# EAGLE board epapertagjig-cam (EAGLE 9.6.2)
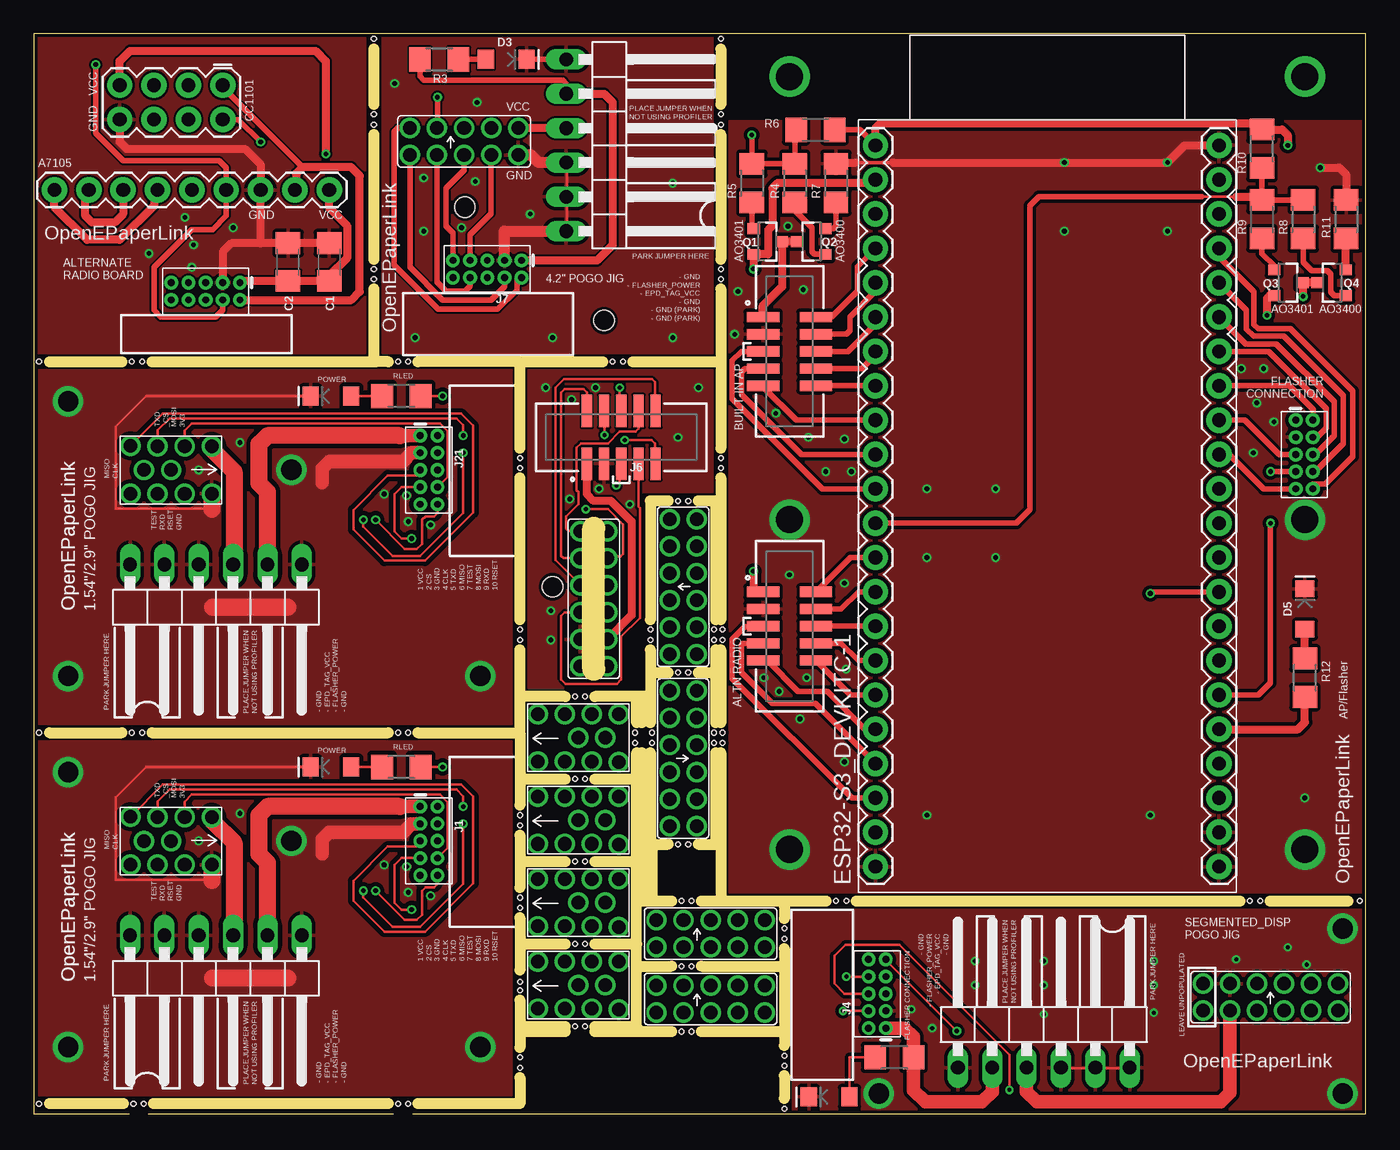
[diagram p0: board, top side]
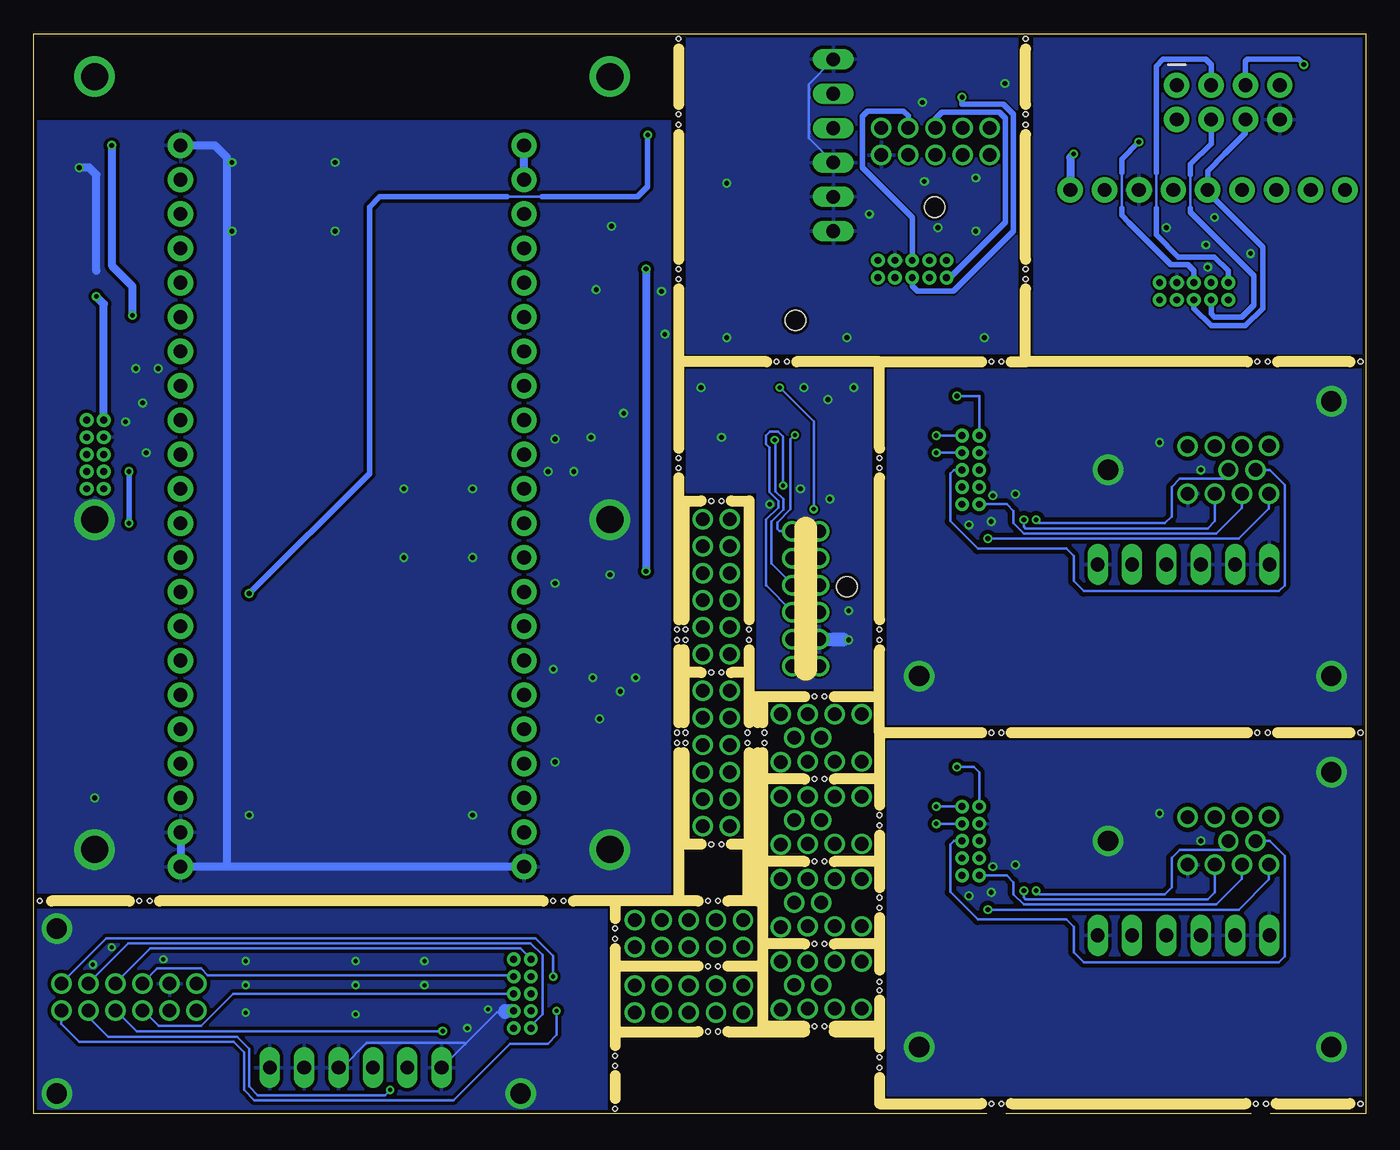
[diagram p1: board, bottom side, seen from below]

Size 98.48 x 79.87 mm. Coordinates in mm from the lower left corner, seen from the top.
Outline: 7.05,0 0,0 0,79.87 98.48,79.87 98.48,0 28,0
Outline: 8.45,0 26.61,0
Copper layers (1*16): Top 0.035mm / dielectric 1.5mm / Bottom 0.035mm
Design rules "dirt_cheap_dirty_boards.v1.1": minimum track width 6mil, minimum drill 12mil, track to track 6mil, track to pad 6mil, pad to pad 6mil, via to via 6mil, smd to smd 0mil, copper to edge 10mil, drill to drill 10mil, minimum pad ring 10mil, minimum via ring 6mil, stop-mask expansion 2mil, vias tented up to drill 25mil, thermal gap 10mil
Net classes: 0 default: width 0.203 mm
Holes 1.5 mm at 38.35,38.99 31.88,67.06 42.16,58.67
Holes 0.35 mm at 7.24,28.19 8,28.19 26.92,28.19 27.69,28.19 26.92,0.76 27.69,0.76 7.37,0.76 8.13,0.76 7.24,55.63 8,55.63 26.92,55.63 27.69,55.63 35.94,3.43 35.94,4.19 25.15,73.91 25.15,73.15 25.15,62.48 25.15,61.72 50.8,61.72 50.8,62.48 50.8,73.91 50.8,73.15 35.94,48.51 35.94,47.75 35.94,35.81 35.94,35.05 45.59,35.05 45.59,35.81 50.93,35.81 50.93,35.05 50.29,35.81 50.29,35.05 50.8,47.75 50.8,48.51 42.8,55.63 43.56,55.63 40.01,6.48 40.77,6.48 40.01,12.57 40.77,12.57 40.01,18.67 40.77,18.67 40.01,24.77 40.77,24.77 40.01,30.86 40.77,30.86 35.94,9.78 35.94,9.14 35.94,16 35.94,15.24 35.94,22.1 35.94,21.34 47.88,10.92 48.64,10.92 47.88,6.1 48.64,6.1 47.88,15.75 48.64,15.75 47.62,19.94 48.39,19.94 47.62,32.64 48.39,32.64 47.62,45.34 48.39,45.34 45.72,28.19 45.72,27.43 44.45,27.43 44.45,28.19 50.29,28.19 50.29,27.43 50.93,28.19 50.93,27.43 55.5,3.56 55.5,4.32 55.5,13.72 55.5,12.95 59.31,15.75 60.07,15.75 89.92,15.75 90.68,15.75 0.38,0.76 0.38,28.19 0.38,55.63 98.04,15.75 55.5,0.38 25.15,79.5 50.8,79.5
Milling: 76 lines

## Footprints (pad centres in the part's own frame; a part is rotated, then mirrored left to right if it is on the bottom)
2X5-SMD-1.27MM = smd 0.76 x 2.4: 1 2.54,1.95; 2 2.54,-1.95; 3 1.27,1.95; 4 1.27,-1.95; 5 0,1.95; 6 0,-1.95; 7 -1.27,1.95; 8 -1.27,-1.95; 9 -2.54,1.95; 10 -2.54,-1.95
1206 = smd 1.6 x 1.8: 1 -1.4,0; 2 1.4,0
LED-1206 = smd 1.2 x 1.4: A -1.5,0; C 1.5,0
2X5-PTH-1.27MM = drill 0.508 pad 1: 1 -2.54,-0.635; 2 -2.54,0.635; 3 -1.27,-0.635; 4 -1.27,0.635; 5 0,-0.635; 6 0,0.635; 7 1.27,-0.635; 8 1.27,0.635; 9 2.54,-0.635; 10 2.54,0.635
SOLUM_ZBS_DEBUG = drill 1 pad 1.27: 3V3 -2.995,-1.744; CLK 0.005,0.006; CS 1.005,-1.744; GND -2.995,1.756; MISO 2.005,0.006; MOSI -0.995,-1.744; RSET -0.995,1.756; RXD 1.005,1.756; TEST 3.005,1.756; TXD 3.005,-1.794
SOLUM_ZBS_DEBUG_SEG = drill 1 pad 1.27: _CS 3,1; CLK 5,-1; EPD_BG -5,-1; EPD_VCOM -5,1; GND -3,1; MISO 3,-1; MOSI 5,1; RSET 1,1; RXD 1,-1; TEST -1,1; TXD -1,-1; VCC -3,-1
SOLUM_ZBS_DEBUG_4.2 = drill 1 pad 1.27: _CS -4,1; CLK -4,-1; GND 4,-1; MISO -2,1; MOSI -2,-1; RSET 0,1; RXD 0,-1; TEST 2,-1; TXD 2,1; VCC 4,1
ESP32-S3_DEVKITC-1 = drill 1.016 pad 1.88: 0 20.32,-25.4; 1 45.72,-25.4; 2 43.18,-25.4; 3 22.86,0; 3V3-1 53.34,0; 3V3-2 50.8,0; 4 45.72,0; 5 43.18,0; 5V 2.54,0; 6 40.64,0; 7 38.1,0; 8 25.4,0; 9 17.78,0; 10 15.24,0; 11 12.7,0; 12 10.16,0; 13 7.62,0; 14 5.08,0; 15 35.56,0; 16 33.02,0; 17 30.48,0; 18 27.94,0; 19 5.08,-25.4; 20 7.62,-25.4; 21 10.16,-25.4; 35 22.86,-25.4; 36 25.4,-25.4; 37 27.94,-25.4; 38 30.48,-25.4; 39 33.02,-25.4; 40 35.56,-25.4; 41 38.1,-25.4; 42 40.64,-25.4; 45 17.78,-25.4; 46 20.32,0; 47 12.7,-25.4; 48 15.24,-25.4; GND_1 0,0; GND_2 0,-25.4; GND_3 2.54,-25.4; GND_4 53.34,-25.4; RSET 48.26,0; RX 48.26,-25.4; TX 50.8,-25.4
1X09 = drill 1.016 pad 1.88: 1 0,0; 2 2.54,0; 3 5.08,0; 4 7.62,0; 5 10.16,0; 6 12.7,0; 7 15.24,0; 8 17.78,0; 9 20.32,0
2X4 = drill 1.016 pad 1.88: 1 -3.81,-1.27; 2 -3.81,1.27; 3 -1.27,-1.27; 4 -1.27,1.27; 5 1.27,-1.27; 6 1.27,1.27; 7 3.81,-1.27; 8 3.81,1.27
1X06/90 = drill 1.016 long: 1 -6.35,-3.81; 2 -3.81,-3.81; 3 -1.27,-3.81; 4 1.27,-3.81; 5 3.81,-3.81; 6 6.35,-3.81
SOT23-3 = smd 0.8 x 0.9: 1 -0.95,-1; 2 0.95,-1; 3 0,1.1
R1206 = smd 1.6 x 1.803: 1 -1.422,0; 2 1.422,0

## Placement (x,y rotation side)
ALTN_RADIO  JTAG  [2X5-SMD-1.27MM]  55.88,36.07 90 top
C1  1.0uF  [1206]  21.84,62.99 90 top
C2  1.0uF  [1206]  18.8,62.99 90 top
D1  [LED-1206]  21.97,25.65 180 top
D2  [LED-1206]  58.8,1.27 180 top
D3  [LED-1206]  34.92,77.98 0 top
D4  [LED-1206]  21.97,53.09 180 top
D5  [LED-1206]  93.98,37.34 90 top
FLASHER_EDGE  CORTEX_JTAG_DEBUG_PTH  [2X5-PTH-1.27MM]  93.94,48.77 270 top
INTERNAL_AP  JTAG  [2X5-SMD-1.27MM]  55.88,56.39 90 top
J1  CORTEX_JTAG_DEBUG_PTH  [2X5-PTH-1.27MM]  29.21,20.19 270 top
J2  [SOLUM_ZBS_DEBUG]  10.16,20.19 180 top
J3  [SOLUM_ZBS_DEBUG_SEG]  91.44,8.64 0 top
J4  CORTEX_JTAG_DEBUG_PTH  [2X5-PTH-1.27MM]  62.36,8.89 90 top
J5  [SOLUM_ZBS_DEBUG_SEG]  41.4,38.1 90 top
J6  JTAG  [2X5-SMD-1.27MM]  43.43,50.04 180 top
J7  CORTEX_JTAG_DEBUG_PTH  [2X5-PTH-1.27MM]  33.53,62.48 180 top
J8  [SOLUM_ZBS_DEBUG_4.2]  31.81,71.91 0 top
J9  ESP32-S3_DEVKITC-1  [ESP32-S3_DEVKITC-1]  62.23,18.29 90 top
J10  CORTEX_JTAG_DEBUG_PTH  [2X5-PTH-1.27MM]  12.7,60.83 180 top
J11  [1X09]  21.84,68.33 180 top
J12  [2X4]  10.16,74.8 180 top
J13  [SOLUM_ZBS_DEBUG]  40.26,21.72 0 top
J14  [SOLUM_ZBS_DEBUG_SEG]  48.01,26.29 270 top
J15  [SOLUM_ZBS_DEBUG_4.2]  50.04,13.33 0 top
J16  [SOLUM_ZBS_DEBUG]  40.26,27.81 0 top
J17  [SOLUM_ZBS_DEBUG_SEG]  48.01,38.99 90 top
J18  [SOLUM_ZBS_DEBUG]  40.26,9.52 0 top
J19  [SOLUM_ZBS_DEBUG]  40.26,15.62 0 top
J20  [SOLUM_ZBS_DEBUG_4.2]  50.04,8.51 0 top
J21  CORTEX_JTAG_DEBUG_PTH  [2X5-PTH-1.27MM]  29.21,47.62 270 top
J22  [SOLUM_ZBS_DEBUG]  10.16,47.62 180 top
JP1  [1X06/90]  13.46,9.4 180 top
JP2  [1X06/90]  74.68,7.24 0 top
JP3  [1X06/90]  43.18,71.63 270 top
JP4  [1X06/90]  13.46,36.83 180 top
Q1  1.1A/60V/600mΩ  [SOT23-3]  54.23,64.52 270 top
Q2  5.8A/30V/35mΩ  [SOT23-3]  57.53,64.52 90 top
Q3  1.1A/60V/600mΩ  [SOT23-3]  92.71,61.47 270 top
Q4  5.8A/30V/35mΩ  [SOT23-3]  96.01,61.47 90 top
R1  [R1206]  27.18,25.65 0 top
R2  [R1206]  63.63,4.19 0 top
R3  [R1206]  29.97,77.98 180 top
R4  100  [R1206]  56.26,68.83 90 top
R5  100  [R1206]  53.09,68.83 90 top
R6  4k7  [R1206]  57.78,72.77 180 top
R7  47  [R1206]  59.31,68.83 90 top
R8  100  [R1206]  93.85,66.17 90 top
R9  100  [R1206]  90.81,66.17 90 top
R10  4k7  [R1206]  90.81,71.37 270 top
R11  47  [R1206]  97.03,66.17 90 top
R12  [R1206]  93.98,32.26 270 top
R13  [R1206]  27.18,53.09 0 top

## Library data of the parts
ALTN_RADIO INTERNAL_AP J6 = SparkFun-Connectors; PROD_ID: CONN-14503
C1 C2 = SparkFun-Capacitors; PROD_ID: CAP-09822
D1-D5 = SparkFun-LED
FLASHER_EDGE J1-J5 J7-J22 = SparkFun-Connectors
JP1-JP4 = pinhead
Q1 Q3 = SparkFun-DiscreteSemi; PROD_ID: TRANS-08285
Q2 Q4 = SparkFun-DiscreteSemi; PROD_ID: TRANS-12988
R1-R13 = rcl; SPICEPREFIX: R

## Nets
3V1: J8.VCC JP3.3
3V2: J22.3V3 JP4.3
3V3: J2.3V3 JP1.3
GND: D1.C J1.3 J2.GND JP1.1 JP1.4 JP1.5 JP1.6
GND1: J5.GND J6.3
GND2: D2.C J3.GND J4.3 JP2.1 JP2.4 JP2.5 JP2.6
GND3: D3.C J7.3 J8.GND JP3.1 JP3.4 JP3.5 JP3.6
GND4: D4.C J21.3 J22.GND JP4.1 JP4.4 JP4.5 JP4.6
N$1: D2.A R2.1
N$2: D1.A R1.1
N$3: D3.A R3.1
N$4: J4.1 JP2.2 R2.2
N$5: J1.4 J2.CLK
N$6: J1.2 J2.CS
N$7: J1.6 J2.MISO
N$8: J3._CS J4.2
N$9: J1.8 J2.MOSI
N$10: J1.10 J2.RSET
N$11: J1.9 J2.RXD
N$12: J1.7 J2.TEST
N$13: J1.5 J2.TXD
N$14: J3.CLK J4.4
N$15: J3.MISO J4.6
N$16: J3.MOSI J4.8
N$17: J3.RSET J4.10
N$18: J3.VCC JP2.3
N$19: J3.RXD J4.9
N$20: J3.TEST J4.7
N$21: J3.TXD J4.5
N$22: J7.4 J8.CLK
N$23: J5._CS J6.2
N$24: J5.CLK J6.4
N$25: J5.MISO J6.6
N$26: J5.MOSI J6.8
N$27: J5.RSET J6.10
N$28: J5.VCC J6.1
N$29: J5.RXD J6.9
N$30: J5.TEST J6.7
N$31: J5.TXD J6.5
N$32: J7.2 J8._CS
N$33: J7.6 J8.MISO
N$34: J7.8 J8.MOSI
N$35: J7.10 J8.RSET
N$36: J7.9 J8.RXD
N$37: J7.7 J8.TEST
N$38: J7.5 J8.TXD
N$39: INTERNAL_AP.1 Q1.3 Q2.3
N$40: Q2.2 R7.1
N$41: R4.2 R5.2 R6.2
N$42: Q2.1 R4.1
N$43: Q1.1 R5.1
N$44: FLASHER_EDGE.1 Q3.3 Q4.3
N$45: J9.8 R8.2 R9.2 R10.2
N$46: Q4.1 R8.1
N$47: Q3.1 R9.1
N$48: Q4.2 R11.1
N$49: INTERNAL_AP.5 J9.18
N$50: INTERNAL_AP.9 J9.16
N$52: INTERNAL_AP.10 J9.15
N$53: INTERNAL_AP.8 J9.7
N$54: INTERNAL_AP.6 J9.6
N$55: INTERNAL_AP.4 J9.5
N$56: INTERNAL_AP.2 J9.4
N$57: FLASHER_EDGE.6 J9.42
N$58: FLASHER_EDGE.10 J9.1
N$59: FLASHER_EDGE.8 J9.2
N$60: FLASHER_EDGE.4 J9.41
N$61: FLASHER_EDGE.2 J9.40
N$62: ALTN_RADIO.2 J9.3
N$63: ALTN_RADIO.4 J9.46
N$64: ALTN_RADIO.6 J9.9
N$65: ALTN_RADIO.8 J9.10
N$66: ALTN_RADIO.10 J9.11
N$67: ALTN_RADIO.9 J9.12
N$68: ALTN_RADIO.7 J9.13
N$69: ALTN_RADIO.5 J9.14
N$70: FLASHER_EDGE.5 J9.39
N$71: FLASHER_EDGE.9 J9.38
N$72: FLASHER_EDGE.7 J9.47
N$73: INTERNAL_AP.7 J9.17
N$75: J9.21 R12.2
N$76: D5.A R12.1
N$77: C1.1 C2.1 J10.1 J11.1 J12.7
N$78: J11.7 J11.8
N$79: C1.2 C2.2 J10.3 J11.3 J12.8
N$80: J11.6 J11.9
N$81: J10.6 J11.5 J12.6
N$82: J10.4 J11.4 J12.5
N$83: J10.2 J11.2 J12.1
N$84: J10.8 J12.4
N$85: D4.A R13.1
N$86: J10.5 J12.2
N$87: J10.9 J12.3
N$88: J21.4 J22.CLK
N$89: J21.2 J22.CS
N$90: J21.6 J22.MISO
N$91: J21.8 J22.MOSI
N$92: J21.10 J22.RSET
N$93: J21.9 J22.RXD
N$94: J21.7 J22.TEST
N$95: J21.5 J22.TXD
V_IN: J1.1 JP1.2 R1.2
V_IN1: J7.1 JP3.2 R3.2
V_IN2: J21.1 JP4.2 R13.2
VDD: ALTN_RADIO.1 J9.3V3-1 J9.3V3-2 Q1.2 Q3.2 R6.1 R10.1
VSS: ALTN_RADIO.3 D5.C FLASHER_EDGE.3 INTERNAL_AP.3 J9.GND_1 J9.GND_2 J9.GND_3 J9.GND_4 R7.2 R11.2

## Tracks (layer width: path | path; a pad name or v marks a point on that pad's centre or on a via)
3V1
  Top 0.61: J8.VCC 39.37,72.91 JP3.3
3V2
  Top 1.27: J22.3V3 13.15,49.15 14.8,47.51 14.8,41.4 14.86,41.4 14.86,40.64 JP4.3
3V3
  Top 1.27: J2.3V3 13.15,21.72 14.8,20.08 14.8,13.97 14.86,13.97 14.86,13.21 JP1.3
GND  (via drill 0.35, 1.5)
  Top 0.203: 13.15,17.27 13.15,17.33 6.04,17.33 6.04,23.4 8.3,25.65 D1.C
  Top 1.016: 21.32,19.25 21.32,20.31 21.84,20.83 27.3,20.83 27.94,21.46 J1.3
  Top 1.27: J2.GND 13.15,17.27 | 18.8,10.03 13.21,10.03
  other vias: 15.24,22.23 25.91,18.42 27.69,16.38 27.56,18.29 29.34,16.13 12.19,20.19 19.05,20.19 2.54,25.27 2.54,4.95 33.02,4.95
  pour Top (isolate 0.305): 0.13,27.56 35.31,27.56 35.31,1.4 0.13,1.4
  pour Bottom (isolate 0.305): 0.13,27.56 35.31,27.56 35.31,1.4 0.13,1.4
GND1  (via drill 0.35)
  Bottom 1.016: J5.GND 38.61,35.1
  other vias: 41.78,46.23 44.07,45.09 38.23,37.21 38.23,35.05 47.62,50.04 49.15,53.72 37.85,53.72 39.62,45.47 39.75,52.83 41.53,53.72
  pour Top: 36.58,54.99 50.16,54.99 50.16,45.97 44.96,45.97 44.96,31.5 36.58,31.5
  pour Bottom: 36.58,31.5 44.96,31.5 44.96,45.97 50.16,45.97 50.16,54.99 36.58,54.99
GND2  (via drill 0.3, 1.5)
  Top 0.203: JP2.4 75.99,3.38 78.37,3.38 JP2.5 | 78.74,3.38 78.49,3.38 JP2.5 | 78.74,3.38 80.99,3.38 JP2.6 | 57.37,1.25 D2.C | 78.74,3.38 JP2.5
  Bottom 0.203: 63.63,7.5 64.24,7.5 66.56,5.19 | 66.56,5.19 68.24,3.5 JP2.1 | JP2.4 75.87,3.5 75.62,3.5 73.87,5.25 66.62,5.25 66.56,5.19
  Bottom 1.016: J4.3 63.63,7.62 63.63,7.5
  other vias: 62.48,1.52 96.77,1.52 96.77,13.72 92.71,12.32 94.11,11.05 82.8,11.3 88.9,11.43 82.8,9.52 74.68,11.3 74.68,9.52 69.6,11.3 69.6,9.52 74.68,7.37 82.8,7.49 64.9,7.75 66.42,6.35
  pour Top (isolate 0.254): 56.13,15.11 56.13,0.13 98.42,0.13 98.42,15.11
  pour Bottom (isolate 0.254): 56.13,15.11 56.13,0.13 98.42,0.13 98.42,15.11
GND3  (via drill 0.35)
  Top 0.203: JP3.4 39.43,70.29 39.43,67.91 JP3.5 39.43,67.79 39.43,65.29 JP3.6
  Top 0.406: JP3.1 D3.C
  Top 0.813: 39.43,65.29 34.8,65.29 J7.3 | JP3.4 37.34,70.36 36.78,70.91 J8.GND
  Bottom 0.203: JP3.1 39.43,77.91 41.18,76.16 41.18,72.16 39.43,70.41 JP3.4
  other vias: 26.67,76.2 32.77,74.8 31.62,65.53 28.83,65.28 28.83,69.22 32.64,68.96 28.19,57.4 36.7,66.55 38.35,57.4 47.24,57.4 47.24,68.83
  pour Top: 50.16,56.26 50.16,79.76 25.78,79.76 25.78,56.26
  pour Bottom: 25.78,79.76 25.78,56.26 50.16,56.26 50.16,79.76
GND4  (via drill 0.35, 1.5)
  Top 0.203: 13.15,44.7 13.15,44.76 6.04,44.76 6.04,50.83 8.3,53.09 D4.C
  Top 1.016: 21.32,46.68 21.32,47.74 21.84,48.26 27.3,48.26 27.94,48.89 J21.3
  Top 1.27: J22.GND 13.15,44.7 | 18.8,37.46 13.21,37.46
  other vias: 15.24,49.66 25.91,45.85 27.69,43.81 27.56,45.72 29.34,43.56 12.19,47.62 19.05,47.62 2.54,52.7 2.54,32.38 33.02,32.38
  pour Top (isolate 0.305): 0.25,54.99 35.31,54.99 35.31,28.83 0.25,28.83
  pour Bottom (isolate 0.305): 0.25,54.99 35.31,54.99 35.31,28.83 0.25,28.83
N$1
  Top 0.203: R2.1 60.3,4.19 D2.A
N$2
  Top 0.203: R1.1 D1.A
N$3
  Top 0.406: D3.A R3.1
N$4
  Top 1.016: JP2.2 70.87,1.65 70.1,0.89 65.91,0.89 65.05,1.75 R2.2 65.05,5.69 64.39,6.35 J4.1
N$5  (via drill 0.35)
  Top 0.203: v24.36,16.51 24.36,16.02 26.54,13.84 28.57,13.84 31.75,17.02 v31.75,21.46
  Bottom 0.203: v24.36,16.51 24.38,16.51 24.13,16.26 14.86,16.26 14.35,16.76 14.35,18.92 13.73,19.55 10.15,19.55 J2.CLK | v31.75,21.46 J1.4
N$6  (via drill 0.35)
  Top 0.203: J2.CS 9.15,23.12 10.03,24 31.24,24 31.75,23.5 v31.75,22.73
  Bottom 0.203: v31.75,22.73 J1.2
N$7
  Bottom 0.203: J2.MISO 7.1,20.18 5.99,19.08 5.99,11.66 6.43,11.23 20.85,11.23 21.59,11.96 21.59,13.84 22.13,14.38 28.67,14.38 30.71,16.41 30.71,19.94 30.45,20.19 J1.6
N$8
  Bottom 0.203: J4.2 61.62,6.38 61.62,6.63 60.87,7.38 60.87,11.75 61.74,12.63 91.49,12.63 94.37,9.75 J3._CS
N$9
  Top 0.203: J1.8 30.61,19.69 30.61,23.05 30.03,23.62 11.68,23.62 11.15,23.09 J2.MOSI
N$10  (via drill 0.35)
  Top 0.203: v25.27,16.51 27.43,14.35 28.32,14.35 28.7,14.73 28.7,16.51 28.96,16.76 29.59,16.76 29.84,17.02 J1.10
  Bottom 0.203: J2.RSET 11.15,16.4 11.68,15.87 25.15,15.87 25.27,16 v25.27,16.51
N$11
  Bottom 0.203: J2.RXD 9.15,17.39 11.05,15.49 25.27,15.49 26.04,16.26 26.04,17.14 26.54,17.65 J1.9
N$12  (via drill 0.35)
  Top 0.203: v27.94,15.11 27.18,15.11 26.67,15.62 26.67,18.42 27.18,18.92 J1.7
  Bottom 0.203: J2.TEST 7.16,17.36 9.4,15.11 v27.94,15.11
N$13
  Top 0.203: J2.TXD 9.53,24.36 31.6,24.36 32.48,23.47 32.48,17.04 28.93,13.49 25.92,13.49 23.63,15.78 23.63,17.24 26.17,19.79 28.57,19.79 J1.5
N$14  (via drill 0.3)
  Top 0.203: J4.4 v59.82,7.62
  Bottom 0.203: v59.82,7.62 59.82,5.84 60.45,5.21 63.25,5.21 67.44,1.02 82.17,1.02 82.93,1.78 82.93,4.57 83.69,5.33 95.12,5.33 96.44,6.65 J3.CLK
N$15  (via drill 0.3)
  Top 0.203: J4.6 59.94,8.89 59.18,9.65 59.18,11.68 60,12.5 63.99,12.5 72.13,4.37 72.14,4.34 v72.14,1.78
  Bottom 0.203: J3.MISO 94.44,7.19 92.96,5.71 83.44,5.71 82.55,4.83 82.55,2.03 81.92,1.4 72.52,1.4 v72.14,1.78
N$16  (via drill 0.3)
  Top 0.203: v60.07,10.16 J4.8
  Bottom 0.203: J3.MOSI 96.37,9.75 93.12,13 61.37,13 60.07,11.71 v60.07,10.16
N$17
  Bottom 0.203: J4.10 61.74,11.5 62.49,12.25 89.87,12.25 92.37,9.75 J3.RSET
N$18
  Top 1.016: JP2.3 73.41,1.65 74.17,0.89 87.76,0.89 88.44,1.57 J3.VCC
N$19  (via drill 0.35)
  Top 0.203: v68.24,6.13 62.99,11.38 J4.9
  Bottom 0.203: v68.24,6.13 90.87,6.13 92.37,7.63 J3.RXD
N$20
  Bottom 0.203: J4.7 62.99,10.25 85.62,10.25 86.12,10.75 89.37,10.75 90.37,9.75 J3.TEST
N$21
  Bottom 0.203: J4.5 62.99,8.88 83.74,8.88 86.12,6.5 89.24,6.5 90.37,7.63 J3.TXD
N$22
  Top 0.406: J7.4 34.8,61.18 33.82,60.2 30.23,60.2 27.81,62.61 J8.CLK
N$23
  Top 0.203: J6.2 40.89,53.34 40.64,53.59 39.24,53.59 38.99,53.34 38.99,41.27 39.16,41.1 J5._CS
N$24  (via drill 0.3)
  Top 0.203: v42.2,50.21 42.2,51.96 J6.4
  Bottom 0.203: v42.2,50.21 42.51,49.89 42.51,44.74 43.5,43.75 43.5,43.25 43.35,43.1 J5.CLK
N$25  (via drill 0.3)
  Top 0.203: v43.32,53.71 43.32,52.09 J6.6 | v40.81,44.72 v40.82,44.72 42.44,44.72 43.57,43.59 43.57,41.41 43.37,41.21 42.45,41.21 J5.MISO
  Bottom 0.203: v43.32,53.71 40.81,51.2 v40.81,44.72
N$26
  Top 0.203: J6.8 44.7,51.96 44.7,50.67 44.48,50.46 43.32,50.46 42.45,49.59 40.45,49.59 40.13,49.27 40.13,46.1 40.26,45.97 40.26,45.09 39.37,44.2 39.37,43.31 39.58,43.1 J5.MOSI
N$27
  Top 0.203: J6.10 45.95,52.09 45.95,54.1 45.71,54.34 39.2,54.34 38.57,53.71 38.57,40.96 40.32,39.21 J5.RSET
N$28
  Top 0.61: J5.VCC 44.2,36.89 44.2,43.81 42.67,45.34 41.4,45.34 40.89,45.85 J6.1
N$29  (via drill 0.3)
  Top 0.203: v43.7,49.84 45.67,49.84 45.95,49.56 45.95,48.21 J6.9
  Bottom 0.203: J5.RXD 42.45,39.21 43.95,40.71 43.95,43.81 43.06,44.7 43.06,45.47 43.63,46.04 43.63,49.84 v43.7,49.84
N$30
  Top 0.203: J6.7 44.7,44.91 44.81,44.81 44.81,36.68 43.44,35.31 43.44,32.13 43.12,31.81 39.31,31.81 38.99,32.13 38.99,35.46 38.99,36.83 39.26,37.1 J5.TEST
N$31  (via drill 0.3)
  Top 0.203: v43.07,46.46 43.32,46.71 43.32,48.09 J6.5
  Bottom 0.203: v43.07,46.46 43.07,50.09 43.45,50.46 44.03,50.46 44.32,50.16 44.32,49.53 44.07,49.28 44.07,45.97 43.43,45.34 43.43,44.83 44.32,43.94 44.32,39.09 42.45,37.21 J5.TXD
N$32
  Top 0.406: J7.2 35.71,61.85 35.71,60.93 34.29,59.51 29.9,59.51 26.65,62.75 26.65,72.63 26.94,72.91 J8._CS
N$33  (via drill 0.35)
  Top 0.406: v29.84,75.18 29.84,72.91 J8.MISO
  Bottom 0.406: J7.6 33.53,61.21 33.15,60.83 30.48,60.83 26.04,65.28 26.04,73.91 26.8,74.68 29.84,74.68 v29.84,75.18
N$34
  Top 0.406: J7.8 32.26,61.21 31.88,60.83 30.48,60.83 29.81,61.5 J8.MOSI
N$35
  Bottom 0.406: J7.10 30.73,61.85 26.65,65.93 26.65,73.64 27.08,74.07 31.34,74.07 31.81,73.6 J8.RSET
N$36
  Top 0.406: J7.9 30.99,65.15 30.48,65.66 30.48,68.45 31.81,69.79 J8.RXD
N$37
  Top 0.406: J7.7 32.26,65.02 33.81,66.58 J8.TEST
N$38
  Bottom 0.406: J7.5 33.53,66.29 37.21,69.98 37.21,73.79 36.83,74.17 34.16,74.17 33.81,73.82 J8.TXD
N$39
  Top 0.406: 53.85,58.93 INTERNAL_AP.1
  Top 0.61: Q2.3 Q1.3 55.33,61.17 53.85,59.69 53.85,58.93
N$40
  Top 0.406: Q2.2 59.12,65.47 59.31,65.66 R7.1
N$41  (via drill 0.35)
  Top 0.406: R6.2 56.26,72.77 R4.2 R5.2 v53.09,72.39 | v82.55,38.48 82.55,38.61 87.63,38.61
  Bottom 0.203: 60.88,67.82 63.5,67.82
  Bottom 0.406: v53.09,72.39 53.09,68.58 53.85,67.82 60.88,67.82 | 63.5,67.82 72.9,67.82 73.66,67.06 73.66,47.37 v82.55,38.48
N$42
  Top 0.406: Q2.1 57.72,63.57 57.53,63.75 57.53,65.53 56.26,66.8 R4.1
N$43
  Top 0.406: Q1.1 53.1,65.59 53.1,67.41 R5.1
N$44  (via drill 0.35)
  Top 0.406: Q3.3 93.85,61.47
  Top 0.61: v93.85,60.45 93.85,61.47 Q4.3
  Bottom 0.61: FLASHER_EDGE.1 93.3,59.9 v93.85,60.45
N$45
  Top 0.203: 86.36,67.82 88.9,67.82
  Top 0.406: R8.2 R9.2 90.81,67.82 R10.2 | 86.36,67.82 74.3,67.82 73.66,67.18 73.66,44.7 72.64,43.69 J9.8
  Top 0.61: 88.9,67.82 90.81,67.82
N$46
  Top 0.406: R8.1 93.85,62.99 94.49,62.36 95.63,62.36 95.89,62.1 95.89,60.77 96.14,60.52 Q4.1
N$47
  Top 0.406: Q3.1 91.71,62.72 90.81,63.63 R9.1
N$48
  Top 0.406: 97.01,64.75 R11.1
  Top 0.61: Q4.2 97.01,64.75
N$49
  Top 0.406: J9.18 58.29,46.23 51.64,52.88 51.64,55.7 52.32,56.39 INTERNAL_AP.5
N$50
  Top 0.406: J9.16 56.39,51.31 53.93,53.77 INTERNAL_AP.9
N$51  (via drill 2)
  other vias: 55.88,76.71
N$52
  Top 0.406: INTERNAL_AP.10 J9.15
N$53
  Top 0.406: J9.7 62.23,56.13 61.21,55.12 INTERNAL_AP.8
N$54
  Top 0.406: INTERNAL_AP.6 60.2,56.39 62.23,58.42 J9.6
N$55
  Top 0.406: INTERNAL_AP.4 60.07,57.66 60.33,57.91 60.33,58.93 62.23,60.83 J9.5
N$56
  Top 0.406: INTERNAL_AP.2 58.98,58.93 60.88,60.83 60.88,62.66 J9.4
N$57
  Top 0.406: J9.42 89.61,56.95 91.87,56.95 96.14,52.68 96.14,50.16 94.74,48.77 FLASHER_EDGE.6
N$58
  Top 0.406: FLASHER_EDGE.10 94.57,46.58 95.48,46.58 97.51,48.61 97.51,53.44 92.89,58.06 90.53,58.06 90.22,58.37 90.22,60.81 87.63,63.4 J9.1
N$59
  Top 0.406: J9.2 89.66,59.44 89.66,58.04 90.19,57.51 92.43,57.51 96.83,53.11 96.83,49.58 94.74,47.5 FLASHER_EDGE.8
N$60
  Top 0.406: FLASHER_EDGE.4 94.59,50.01 94.84,50.01 95.56,50.72 95.56,52.15 91.31,56.39 J9.41
N$61
  Top 0.406: FLASHER_EDGE.2 94.61,51.31 94.61,52.07 92.84,53.85 J9.40
N$62
  Top 0.406: ALTN_RADIO.2 60.37,41.15 J9.3
N$63
  Top 0.406: ALTN_RADIO.4 59.69,37.34 60.96,38.61 J9.46
N$64
  Top 0.406: ALTN_RADIO.6 J9.9
N$65
  Top 0.406: ALTN_RADIO.8 59.69,34.8 60.96,33.53 J9.10
N$66
  Top 0.406: J9.11 60.37,30.99 ALTN_RADIO.10
N$67
  Top 0.406: ALTN_RADIO.9 54.23,33.53 56.52,31.24 58.67,31.24 61.47,28.45 J9.12
N$68
  Top 0.406: ALTN_RADIO.7 52.45,34.8 52.32,34.67 52.32,32.64 54.61,30.35 57.78,30.35 J9.13
N$69
  Top 0.406: ALTN_RADIO.5 53.93,36.04 52.58,36.04 51.64,35.1 51.64,32.21 60.48,23.37 J9.14
N$70
  Top 0.406: FLASHER_EDGE.5 92.08,48.77 89.53,51.31 J9.39
N$71
  Top 0.406: FLASHER_EDGE.9 90.93,46.23 88.39,48.77 J9.38
N$72  (via drill 0.35)
  Top 0.406: FLASHER_EDGE.7 v91.44,47.5 | v91.44,43.69 91.44,31.88 90.55,30.99 J9.47
  Bottom 0.406: v91.44,47.5 v91.44,43.69
N$73
  Top 0.406: J9.17 56.77,48.77 52.32,53.21 52.32,54.86 52.58,55.12 INTERNAL_AP.7
N$74  (via drill 2)
  other vias: 93.98,76.71
N$75
  Top 0.61: J9.21 93.47,28.45 93.98,28.96 R12.2
N$76
  Top 0.61: R12.1 D5.A
N$77  (via drill 0.35)
  Top 0.61: J10.1 15.24,61.59 C2.1 C1.1 21.84,61.98 23.2,63.33 23.2,65.65 21.84,67.01 J11.1 | J12.7 6.35,77.85 7.11,78.61 20.83,78.61 21.59,77.85 v21.59,70.99
  Bottom 0.61: v21.59,70.99 21.84,70.74 J11.1
N$78
  Top 0.61: J11.7 6.6,66.55 5.97,65.91 4.32,65.91 3.81,66.42 3.81,68.33 J11.8
N$79  (via drill 0.35)
  Top 0.61: C1.2 C2.2 | C2.2 14.61,64.39 13.97,63.75 J10.3 | C2.2 16.76,64.39 J11.3 16.76,70.23 15.62,71.37 6.86,71.37 6.35,71.88 J12.8
  other vias: 11.18,66.29 8.51,63.63 11.81,64.26 14.73,65.53 11.68,62.61
  pour Bottom: 0.13,79.76 24.51,79.76 24.51,56.26 0.13,56.26
  pour Top: 0.13,79.76 24.51,79.76 24.51,56.26 0.13,56.26
N$80
  Top 0.61: J11.6 8.89,68.33 8.89,67.18 6.35,64.64 3.94,64.64 1.52,67.06 J11.9
N$81
  Bottom 0.406: J10.6 12.7,59.56 11.43,58.29 8.89,58.29 7.62,59.56 7.62,64.11 9.42,65.91 11.68,68.17 J11.5 11.68,69.72 10.41,70.99 8.89,72.52 J12.6
N$82  (via drill 0.35)
  Top 0.406: J10.4 13.97,59.44 13.46,58.93 9.4,58.93 8.89,59.44 8.89,62.61 11.68,65.41 13.21,65.41 14.22,66.42 J11.4 14.22,69.98 13.72,70.48 6.6,70.48 4.57,72.52 v4.57,77.6
  Bottom 0.406: v4.57,77.6 4.95,77.98 8.76,77.98 8.89,77.85 J12.5
N$83
  Top 0.203: 14,75.87 J12.1 | 19.75,70.12 19.86,70.03
  Top 0.406: 19.75,70.12 14,75.87
  Top 0.61: J10.2 23.5,60.2 24.09,60.79 24.09,69.38 23.44,70.03 19.86,70.03 19.38,69.55 19.38,68.33 J11.2
N$84
  Bottom 0.203: 12.95,66.98 12.95,69.47
  Bottom 0.406: J10.8 11.43,59.18 11.18,58.93 9.14,58.93 8.26,59.82 8.26,61.98 11.56,65.28 12.95,66.68 12.95,66.98 | 12.95,69.47 12.95,70.23 11.43,71.76 J12.4
N$85
  Top 0.203: R13.1 D4.A
N$86  (via drill 0.35)
  Top 0.406: v16.76,71.88 15.11,73.53 J12.2
  Bottom 0.203: 18.03,66.98 18.03,69.6
  Bottom 0.406: J10.5 12.7,62.36 13.16,62.81 14.4,62.81 16.05,64.47 17.5,65.91 18.03,66.45 18.03,66.98 | 18.03,69.6 18.03,70.61 v16.76,71.88
N$87
  Bottom 0.203: 15.49,66.98 15.49,69.6
  Bottom 0.406: J10.9 10.16,62.36 11.18,63.37 13.84,63.37 15.49,65.02 15.49,66.98 | 15.49,69.6 15.49,77.47 14.99,77.98 11.81,77.98 11.43,77.6 J12.3
N$88  (via drill 0.35)
  Top 0.203: v24.36,43.94 24.36,43.45 26.54,41.27 28.57,41.27 31.75,44.45 v31.75,48.89
  Bottom 0.203: v24.36,43.94 24.38,43.94 24.13,43.69 14.86,43.69 14.35,44.2 14.35,46.35 13.73,46.98 10.15,46.98 J22.CLK | v31.75,48.89 J21.4
N$89  (via drill 0.35)
  Top 0.203: J22.CS 9.15,50.56 10.03,51.43 31.24,51.43 31.75,50.93 v31.75,50.16
  Bottom 0.203: v31.75,50.16 J21.2
N$90
  Bottom 0.203: J22.MISO 7.1,47.61 5.99,46.51 5.99,39.09 6.43,38.66 20.85,38.66 21.59,39.39 21.59,41.27 22.13,41.81 28.67,41.81 30.71,43.85 30.71,47.37 30.45,47.62 J21.6
N$91
  Top 0.203: J21.8 30.61,47.12 30.61,50.48 30.03,51.05 11.68,51.05 11.15,50.52 J22.MOSI
N$92  (via drill 0.35)
  Top 0.203: v25.27,43.94 27.43,41.78 28.32,41.78 28.7,42.16 28.7,43.94 28.96,44.2 29.59,44.2 29.84,44.45 J21.10
  Bottom 0.203: J22.RSET 11.15,43.84 11.68,43.31 25.15,43.31 25.27,43.43 v25.27,43.94
N$93
  Bottom 0.203: J22.RXD 9.15,44.82 11.05,42.93 25.27,42.93 26.04,43.69 26.04,44.58 26.54,45.09 J21.9
N$94  (via drill 0.35)
  Top 0.203: v27.94,42.54 27.18,42.54 26.67,43.05 26.67,45.85 27.18,46.35 J21.7
  Bottom 0.203: J22.TEST 7.16,44.79 9.4,42.54 v27.94,42.54
N$95
  Top 0.203: J22.TXD 9.53,51.79 31.6,51.79 32.48,50.9 32.48,44.47 28.93,40.92 25.92,40.92 23.63,43.21 23.63,44.68 26.17,47.22 28.57,47.22 J21.5
V_IN  (via drill 0.35)
  Top 0.203: v30.23,25.65 R1.2
  Top 1.016: J1.1 27.05,22.73
  Top 1.27: JP1.2 17.27,18.58 16.65,19.2 16.65,22.11 17.27,22.73 27.05,22.73
  Bottom 0.203: J1.1 28.57,25.27 28.96,25.65 v30.23,25.65
V_IN1
  Top 0.406: R3.2 28.55,76.73 28.83,76.45 39.12,76.45 39.37,76.2 JP3.2
  Top 0.61: JP3.2 42.16,75.44 42.8,74.8 42.8,64.26 41.66,63.12 J7.1
V_IN2  (via drill 0.35)
  Top 0.203: v30.23,53.09 R13.2
  Top 1.016: J21.1 27.05,50.16
  Top 1.27: JP4.2 17.27,46.01 16.65,46.63 16.65,49.54 17.27,50.16 27.05,50.16
  Bottom 0.203: J21.1 28.57,53.09 v30.23,53.09
VDD  (via drill 0.35)
  Top 0.406: R6.1 61.09,72.77 J9.3V3-1
  Top 0.61: v92.71,71.63 92.71,72.39 92.3,72.8 R10.1 90.81,73.28 62.61,73.28 62.23,72.9 J9.3V3-1 | v91.19,59.05 91.19,60.32 91.38,60.52 Q3.2 | J9.3V3-2 62.23,68.83 54.99,68.83 54.61,68.45 54.61,65.69 54.3,65.37 54.3,63.57 Q1.2 53.23,62.61 53.21,62.61 v53.21,62.48 | v53.21,40.13 53.21,38.61 ALTN_RADIO.1
  Bottom 0.61: v92.71,71.63 92.71,62.74 91.19,61.21 v91.19,59.05 | J9.3V3-2 J9.3V3-1 | v53.21,62.48 v53.21,40.13
VSS  (via drill 0.35, 2)
  Top 0.254: 60.78,70.36 63.5,70.36
  Top 0.61: v95.12,69.98 96.52,69.98 97.03,69.47 R11.2 | R7.2 59.31,70.36 60.78,70.36 | 63.5,70.36 v76.2,70.36 v83.82,70.36 85.09,71.63 J9.GND_4
  Bottom 0.61: 93.85,62.36 93.85,69.47 94.36,69.98 v95.12,69.98 | J9.GND_4 85.09,71.63 84.2,70.74 84.2,18.29 | 84.2,18.29 J9.GND_2 J9.GND_3 | J9.GND_1 84.2,18.29
  other vias: 56.64,29.21 59.94,26.04 53.98,32.26 55.12,31.24 55.88,39.88 57.15,32.26 60.07,32.89 59.94,39.24 54.86,51.82 57.28,50.04 59.94,49.91 58.55,47.5 60.45,47.5 55.75,65.66 89.28,55.12 90.93,55.12 90.42,52.58 91.69,51.18 90.17,48.89 55.88,43.94 93.98,43.94 55.88,19.56 93.98,19.56 66.04,22.1 82.55,22.1 93.98,23.37 71.12,41.15 66.04,41.15 71.12,46.23 66.04,46.23 76.2,65.28 83.82,65.28 51.82,57.66 52.07,60.83 56.9,60.96
  pour Top (isolate 0.254): 51.44,16.38 51.44,73.41 98.42,73.41 98.42,16.38
  pour Bottom (isolate 0.254): 51.44,73.41 51.44,16.38 98.42,16.38 98.42,73.41

## Text on the board
tNames: VCC | PLACE JUMPER WHEN / NOT USING PROFILER | CC1101 | VCC | GND | A7105 | GND | GND | VCC | OpenEPaperLink | PARK JUMPER HERE | AO3401 | AO3400 | ALTERNATE / RADIO BOARD | 4.2" POGO JIG | - GND / - FLASHER_POWER / - EPD_TAG_VCC / - GND / - GND (PARK) / - GND (PARK) | AO3401 | AO3400 | OpenEPaperLink | FLASHER / CONNECTION | POWER | RLED | TXD / _CS / MOSI / 3V3 | BUILT-IN AP | MISO / CLK | TEST / RXD / RSET / GND | 1 VCC / 2 CS / 3 GND / 4 CLK / 5 TXD / 6 MISO / 7 TEST / 8 MOSI / 9 RXD / 10 RSET | OpenEPaperLink | OpenEPaperLink | 1.54"/2.9" POGO JIG | PARK JUMPER HERE | PLACE JUMPER WHEN / NOT USING PROFILER | - GND / - EPD_TAG_VCC / - FLASHER_POWER / - GND | ALTN RADIO | AP/Flasher | POWER | RLED | TXD / _CS / MOSI / 3V3 | MISO / CLK | OpenEPaperLink | TEST / RXD / RSET / GND | PLACE JUMPER WHEN / NOT USING PROFILER | PARK JUMPER HERE | - GND / - FLASHER_POWER / - EPD_TAG_VCC / - GND | SEGMENTED_DISP / POGO JIG | FLASHER CONNECTION | 1 VCC / 2 CS / 3 GND / 4 CLK / 5 TXD / 6 MISO / 7 TEST / 8 MOSI / 9 RXD / 10 RSET | OpenEPaperLink | OpenEPaperLink | 1.54"/2.9" POGO JIG | LEAVE UNPOPULATED | OpenEPaperLink | PARK JUMPER HERE | PLACE JUMPER WHEN / NOT USING PROFILER | - GND / - EPD_TAG_VCC / - FLASHER_POWER / - GND
tValues: FLASHER CONNECTION | FLASHER CONNECTION